# Altium PCB AQCA-Control-Interface.PcbDoc
Units mm, origin at the board's own origin, x right, y up, seen from the top; angles counter-clockwise.
Board outline 120 x 70 mm, 2 copper layers (Top Layer, Bottom Layer); 125 components, 84 nets, 423 pads, 100 vias.
Unrouted connection lines stored in the file: 4.
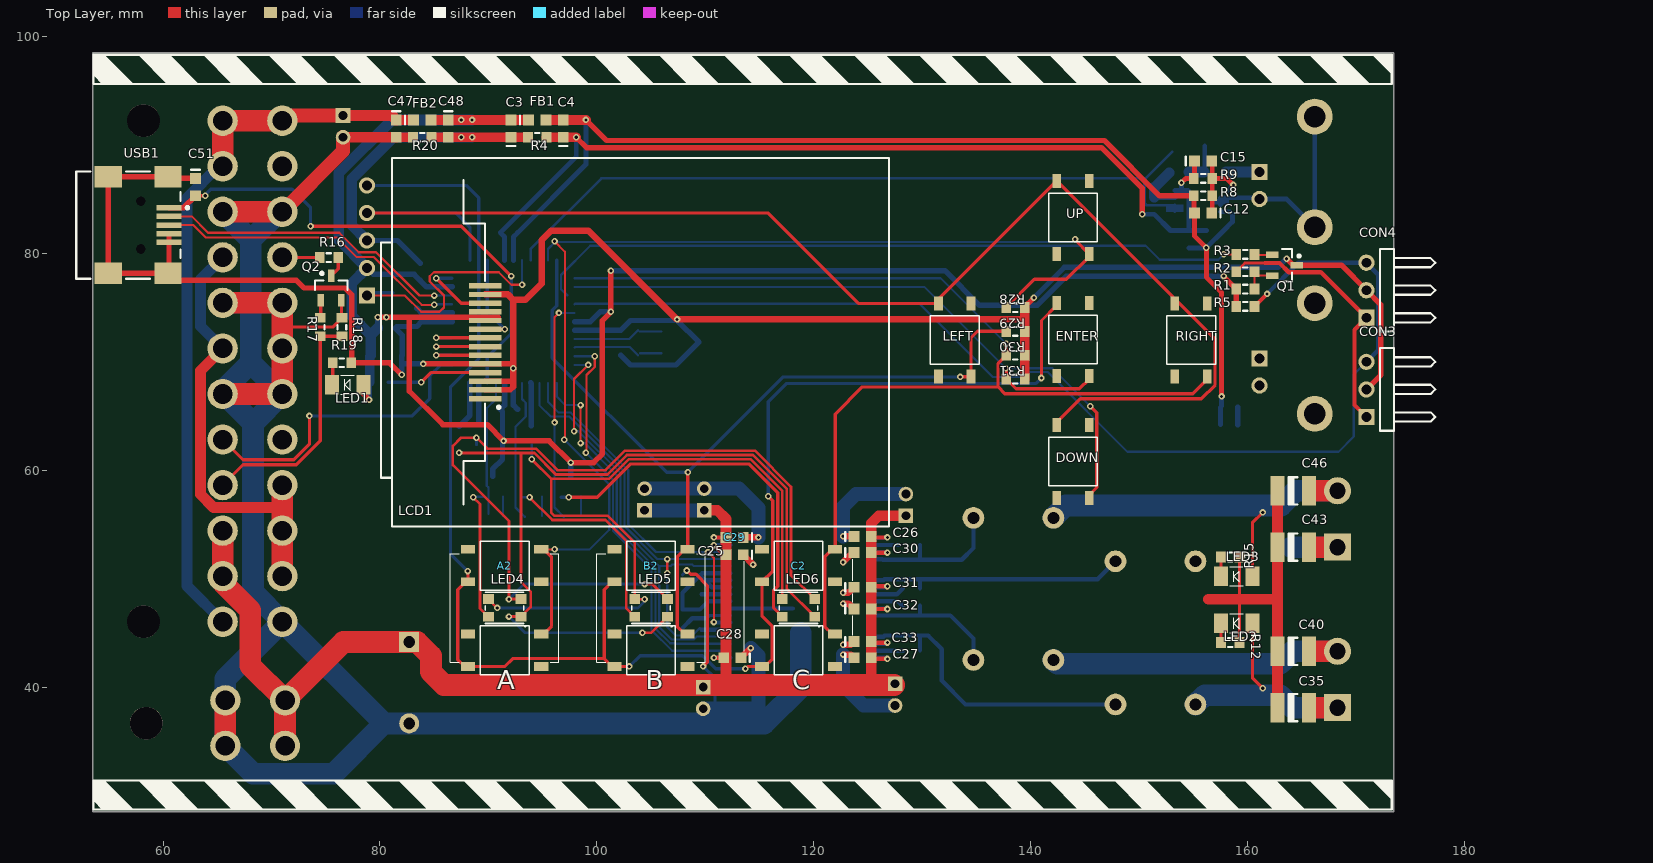
[diagram p0: Top Layer view]
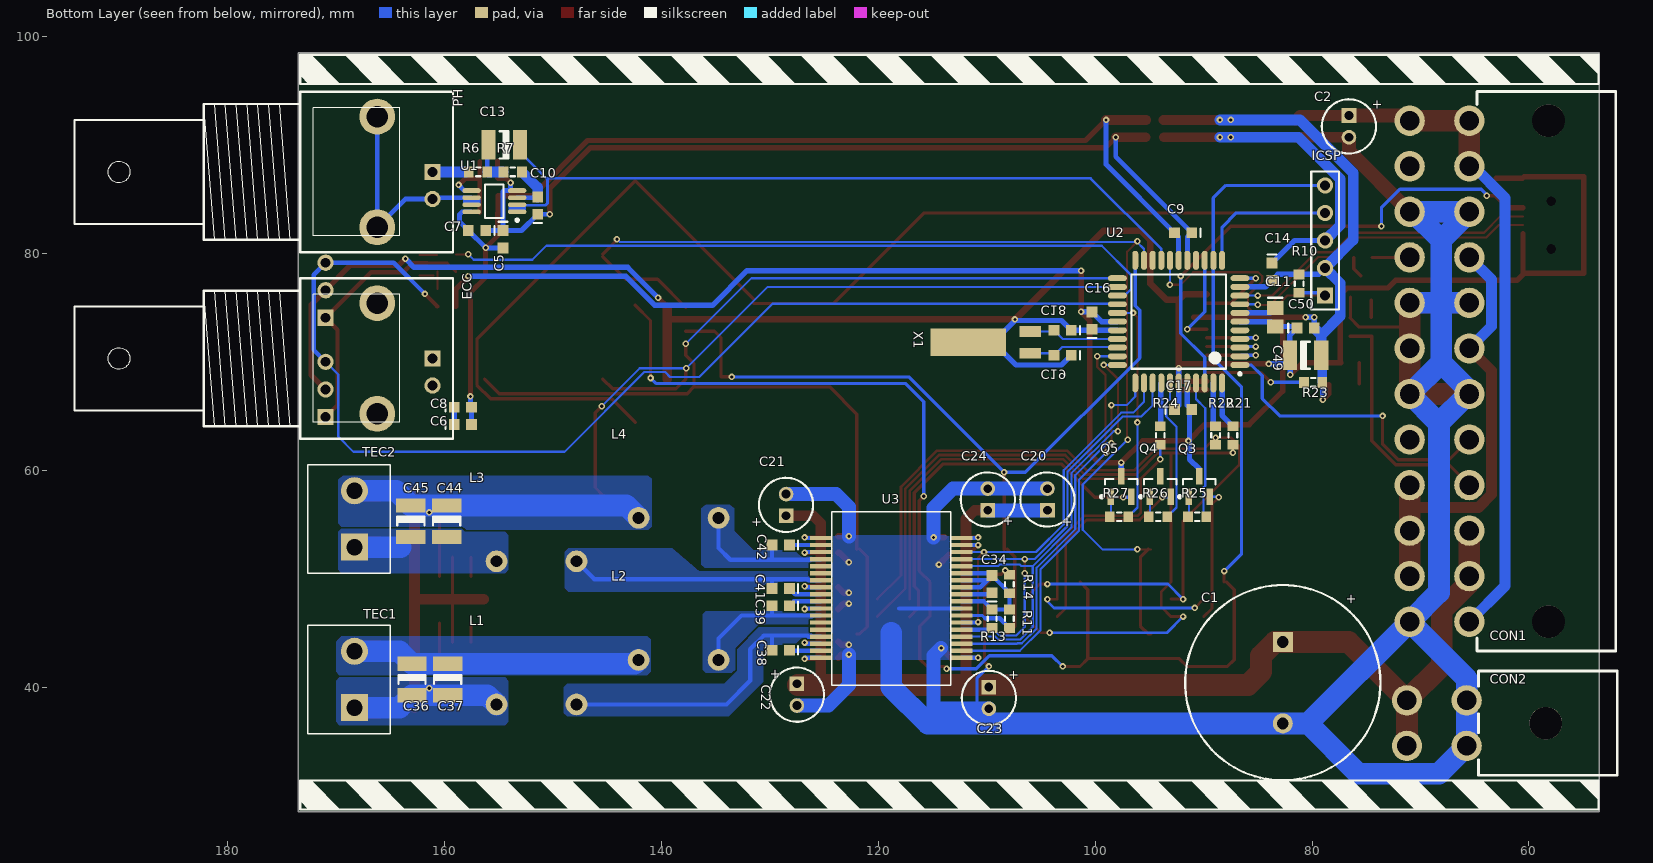
[diagram p1: Bottom Layer view, seen from below]

## Layer stack, top to bottom
Top Layer: signal copper 0.0356
Dielectric: dielectric 0.32, FR-4, Dk 4.8
Bottom Layer: signal copper 0.0356

## Board outline
53.5,98.5 53.5,28.5 173.5,28.5 173.5,98.5

## Design rules (kind name [scope] priority, off if disabled: settings)
Clearance [All] p1: gap=0.152
DiffPairsRouting [All] p1: maxlimit=0.254 minlimit=0.254 mostfreqgap=0.254 maxuncoupledlength=12.7
HoleSize [All] p1: absolutevalues=TRUE maxlimit=6.3 minlimit=0.3 maxpercent=80.000 minpercent=20.000
HoleToHoleClearance [All] p1: gap=0.1 allowstackedmicrovias=TRUE
MinimumSolderMaskSliver [All] p1: minsoldermaskwidth=0.1
PlaneClearance [All] p1: clearance=0.5
PlaneConnect [All] p1: planeconnectstyle=Direct reliefexpansion=0.508 reliefentries=4 reliefconductorwidth=0.254 reliefairgap=0.254
PolygonConnect [All] p1: connectstyle=Direct reliefconductorwidth=0.254 reliefentries=4 polygonreliefangle="90 Angle"
RoutingVias [All] p1: holewidth=0.3 width=0.6 viastyle="Through Hole" minholewidth=0.3 minwidth=0.6 maxholewidth=6.3 maxwidth=7
SilkToSilkClearance [All] p1: silktosilkclearance=0.1
SilkscreenOverComponentPads [All] p1: minsilkscreentomaskgap=0.1
SolderMaskExpansion [All] p1: expansion=0.05
Width [All] p1: maxlimit=12.7 minlimit=0.152 preferedwidth=0.152
20 further rules are at their usual default settings.

## Classes and differential pairs
component class AQCA-Control-IO-B0: A A2 B B2 C C2 C49 C50 C51 CON3 CON4 DOWN ENTER ICSP LCD1 LED4 LED5 LED6 LEFT Q1 Q3 Q4 Q5 R1 R2 R3 R5 R21 R22 R23 R24 R25 R26 R27 R28 R29 R30 R31 RIGHT UP USB1
component class AQCA-Control-uC-B0: C3 C4 C5 C6 C7 C8 C9 C10 C11 C12 C13 C14 C15 C16 C17 C18 C19 ECC FB1 PH R4 R6 R7 R8 R9 R10 U1 U2 X1
component class AQCA-Control-Power-B0: C2 C20 C21 C22 C23 C24 C25 C26 C27 C28 C29 C30 C31 C32 C33 C34 C35 C36 C37 C38 C39 C40 C41 C42 C43 C44 C45 C46 C47 C48 CON1 CON2 FB2 L1 L2 L3 L4 LED1 LED2 LED3 Q2 R11 R12 R13 R14 R15 R16 R17 R18 R19 R20 TEC1 TEC2 U3
differential pair USB_D: +USB_D_P -USB_D_N

## Components (designator, comment, footprint, x,y, rotation, side; value= is the part's Value field where it differs from the comment)
A "Tact Button NO" "TACT SMD 4.5×4.5mm" 95,41.9 r180 top
A2 "Tact Button NO" "TACT SMD 4.5×4.5mm" 95,49.7 r180 top
B "Tact Button NO" "TACT SMD 4.5×4.5mm" 108.5,41.9 r180 top
B2 "Tact Button NO" "TACT SMD 4.5×4.5mm" 108.5,49.7 r180 top
C "Tact Button NO" "TACT SMD 4.5×4.5mm" 122.1,41.9 r180 top
C1 "1200µF" CAPPR7.5-18x35.5 82.7,40.4 r270 bottom
C2 "Tact Button NO" "TACT SMD 4.5×4.5mm" 122.1,49.7 r180 top
C2 "33µF" CAPPR2-5x11 76.6,91.7 r270 bottom
C3 "100nF" CAPC1608N 92.1,91.5 r90 top
C4 "100nF" CAPC1608N 96.9,91.5 r90 top
C5 "100nF" CAPC1608N 154.6,81.3 r270 bottom
C6 "100nF" CAPC1608N 158.3,64.2 r180 bottom
C7 "1µF" CAPC1608N 157,82.1 r0 bottom
C8 "1µF" CAPC1608N 158.3,65.8 r180 bottom
C9 "100nF" CAPC1608N 91.9,81.9 r0 bottom
C10 "1µF" CAPC1608N 151.4,84.4 r90 bottom
C11 "10µF" CAPC2012N 83.4,74.1 r270 bottom
C12 "100nF" CAPC1608N 155.9,83.7 r180 top
C13 "10µF" CAPC3225N 154.5,90 r0 bottom
C14 "100nF" CAPC1608N 83.7,78.3 r270 bottom
C15 "100nF" CAPC1608N 155.9,88.5 r0 top
C16 "100nF" CAPC1608N 100.3,73.8 r90 bottom
C17 "100nF" CAPC1608N 91.9,65.6 r180 bottom
C18 "16pF" CAPC1608N 103,72.9 r0 bottom
C19 "16pF" CAPC1608N 103,70.6 r0 bottom
C20 "33µF" CAPPR2-5x11 104.4,57.3 r90 bottom
C21 "33µF" CAPPR2-5x11 128.5,56.8 r90 bottom
C22 "33µF" CAPPR2-5x11 127.5,39.3 r270 bottom
C23 "33µF" CAPPR2-5x11 109.8,39 r270 bottom
C24 "33µF" CAPPR2-5x11 109.9,57.3 r90 bottom
C25 "100nF" CAPC1608N 112.7,52.2 r180 top
C26 "100nF" CAPC1608N 124.5,53.9 r0 top
C27 "100nF" CAPC1608N 124.5,42.7 r0 top
C28 "100nF" CAPC1608N 112.5,42.7 r180 top
C29 "100nF" CAPC1608N 112.7,53.8 r180 top
C30 "100nF" CAPC1608N 124.5,52.4 r0 top
C31 "100nF" CAPC1608N 124.5,49.2 r0 top
C32 "100nF" CAPC1608N 124.5,47.2 r0 top
C33 "100nF" CAPC1608N 124.5,44.2 r0 top
C34 "100nF" CAPC1608N 109.5,49.5 r90 bottom
C35 "10µF" CAPC3225N 164.2,38.1 r0 top
C36 "10µF" CAPC3225N 163,40.7 r270 bottom
C37 "10µF" CAPC3225N 159.7,40.7 r270 bottom
C38 "100nF" CAPC1608N 129,43.4 r0 bottom
C39 "100nF" CAPC1608N 129,47.5 r0 bottom
C40 "10µF" CAPC3225N 164.2,43.3 r0 top
C41 "100nF" CAPC1608N 129,49.1 r0 bottom
C42 "100nF" CAPC1608N 129,53.1 r0 bottom
C43 "10µF" CAPC3225N 164.2,52.9 r0 top
C44 "10µF" CAPC3225N 159.8,55.3 r270 bottom
C45 "10µF" CAPC3225N 163.1,55.3 r270 bottom
C46 "10µF" CAPC3225N 164.2,58.1 r0 top
C47 "100nF" CAPC1608N 81.5,91.5 r270 top
C48 "100nF" CAPC1608N 86.3,91.5 r270 top
C49 "10µF" CAPC3225N 80.6,70.6 r180 bottom
C50 "100nF" CAPC1608N 80.6,73.1 r180 bottom
C51 "100nF" CAPC1608N 63,86.1 r270 top
CON1 "Molex Mini-Fit 24pin" "Molex Mini-Fit 24pin 90deg" 63.8,69.1 r90 bottom
CON2 "Molex Mini-Fit 4pin" "Molex Mini-Fit 4pin 90deg" 63,36.7 r90 bottom
CON3 "Header 3H" HDR1X3H 170.959,64.908 r90 top
CON4 "Header 3H" HDR1X3H 170.959,74.052 r90 top
DOWN "Tact Button NO" "TACT SMD 4.5×4.5mm" 142.4,57.3 r90 top
ECC "BNC" "BNC_RA CON" 161.1,70.3 r180 bottom
ENTER "Tact Button NO" "TACT SMD 4.5×4.5mm" 142.4,68.55 r90 top
FB1 "120" INDC1608N 94.5,92.3 r0 top
FB2 "120" INDC1608N 83.9,92.3 r0 top
ICSP "Header 5" HDR1X5 78.8,76.1 r90 bottom
L1 "3.9µH" "Inductor AIUR5-6" 151.5,38.4 r0 bottom
L2 "3.9µH" "Inductor AIUR5-6" 138.4,42.5 r0 bottom
L3 "3.9µH" "Inductor AIUR5-6" 151.5,51.6 r0 bottom
L4 "3.9µH" "Inductor AIUR5-6" 138.4,55.6 r0 bottom
LCD1 "LCD JD-T1800" "LCD JD-T1800" 89.7,71.8 r270 top
LED1 "Green" "LED 3216m" 77.022,67.872 r180 top
LED2 "Red" "LED 3216m" 159,45.9 r180 top
LED3 "Blue" "LED 3216m" 159,50.2 r180 top
LED4 "LED RGB common A" "LED 3528m" 91.5,47.3 r270 top
LED5 "LED RGB common A" "LED 3528m" 105,47.3 r270 top
LED6 "LED RGB common A" "LED 3528m" 118.6,47.3 r270 top
LEFT "Tact Button NO" "TACT SMD 4.5×4.5mm" 131.5,68.5 r90 top
PH "BNC" "BNC_RA CON" 161.1,87.5 r180 bottom
Q1 "*" SOT23_N 163.4,78.9 r0 top
Q2 "S8050" SOT23_N 75.5,76.8 r90 top
Q3 "MOSFET P-Ch" SOT23-3N 90.4,58.5 r90 bottom
Q4 "MOSFET P-Ch" SOT23-3N 94,58.5 r90 bottom
Q5 "MOSFET P-Ch" SOT23-3N 97.6,58.5 r90 bottom
R1 "10K" RESC1608N 159.8,76.7 r180 top
R2 "1K" RESC1608N 159.8,78.3 r180 top
R3 "10K" RESC1608N 159.8,79.9 r0 top
R4 "0" RESC1608N 94.5,90.7 r0 top
R5 "10K" RESC1608N 159.8,75.1 r180 top
R6 "10K" RESC1608N 156.9,87.5 r180 bottom
R7 "10K" RESC1608N 153.7,87.5 r180 bottom
R8 "12.4K" RESC1608N 155.9,85.3 r180 top
R9 "12.4K" RESC1608N 155.9,86.9 r0 top
R10 "10K" RESC1608N 81.2,77.2 r270 bottom
R11 "27K" RESC1608N 107.9,46.3 r270 bottom
R12 "1K" RESC1608N 158.4,44.1 r0 top
R13 "10K" RESC1608N 109.5,46.3 r270 bottom
R14 "0" RESC1608N 107.9,49.5 r270 bottom
R15 "1K" RESC1608N 158.4,52 r0 top
R16 "10K" RESC1608N 75.3,79.6 r0 top
R17 "10K" RESC1608N 74.5,73.2 r270 top
R18 "10K" RESC1608N 76.5,73.2 r270 top
R19 "470" RESC1608N 76.5,69.9 r180 top
R20 "0" RESC1608N 83.9,90.7 r0 top
R21 "470" RESC1608N 87.3,63.2 r270 bottom
R22 "330" RESC1608N 88.9,63.2 r270 bottom
R23 "0" RESC1608N 79.9,68.1 r0 bottom
R24 "330" RESC1608N 94,63.2 r270 bottom
R25 "1K" RESC1608N 90.6,55.7 r180 bottom
R26 "1K" RESC1608N 94.2,55.7 r180 bottom
R27 "1K" RESC1608N 97.8,55.7 r0 bottom
R28 "10K" RESC1608N 138.6,75 r180 top
R29 "10K" RESC1608N 138.6,72.8 r180 top
R30 "10K" RESC1608N 138.6,70.6 r180 top
R31 "10K" RESC1608N 138.6,68.4 r180 top
RIGHT "Tact Button NO" "TACT SMD 4.5×4.5mm" 153.3,68.5 r90 top
TEC1 "High-Power Connector 2p" "High-Power Connector 2" 168.3,38.1 r90 bottom
TEC2 "High-Power Connector 2p" "High-Power Connector 2" 168.3,52.9 r90 bottom
U1 "MAX4477" UMAX8_N 155.4,84.8 r0 bottom
U2 "PIC32MX250FxxxD" TQFP44_N 92.3,73.7 r0 bottom
U3 "DRV8432" PSOP3-36 112.3,42.7 r90 bottom
UP "Tact Button NO" "TACT SMD 4.5×4.5mm" 142.4,79.8 r90 top
USB1 "USB-Conn Mini-B SMD" 440478 52.7,82.6 r180 top
X1 "Crystal" "Quartz Can 2.1mm Hor" 111.7,71.8 r180 bottom

## Footprints (in the part's own frame and the unit in brackets; to place one, negate y for a bottom-side part, rotate by r counter-clockwise, add the part's x,y. Pads: shape width x height; smd on the part's side, far side on the other; paste and mask are expansions set on the pad)
440478 [mm] "Connector; USB2.0, Type A, SM; 5 Position; Right Angle"
  rect 2.3x0.5 smd: 1(-7.85,-1.6) 2(-7.85,-0.8) 3(-7.85,0) 4(-7.85,0.8) 5(-7.85,1.6)
  rect 2.5x2 smd: 6(-7.75,4.45) 7(-2.25,4.45) 8(-7.75,-4.45) 9(-2.25,-4.45)
  round 0.6 hole 0.9 unplated: MH1(-5.25,2.2) MH2(-5.25,-2.2)
  silkscreen extent -9.68,-4.95 0.7,4.95
"BNC_RA CON" [mm] "Connector; BNC Elbow"
  rect 1.5x1.5 hole 0.9: 1(0,0)
  round 3.3 hole 2: 2(-5.1,-5.1) 2(-5.1,5.1)
  round 1.5 hole 0.9: 2(0,-2.5)
  silkscreen extent -33,-7.4 1.9,7.4
CAPC1608N [mm] "Chip Capacitor, Body 1.6x0.8mm, IPC Medium Density"
  rect 1x1 smd: 1(-0.8,0) 2(0.8,0)
  silkscreen extent -1.6,-0.4 -1.6,0.4, body extent -0.87,-0.48 0.87,0.48, height 0.85
CAPC2012N [mm] "Chip Capacitor, Body 2.0x1.3mm, IPC Medium Density"
  rect 1.3x1.5 smd: 1(-0.85,0) 2(0.85,0)
  silkscreen extent -1.8,-0.65 -1.8,0.65, body extent -1.1,-0.72 1.1,0.72, height 1.1
CAPC3225N [mm] "Chip Capacitor, Body 3.2x2.5mm, IPC Medium Density"
  rect 1.3x2.7 smd: 1(-1.45,0) 2(1.45,0)
  silkscreen extent -0.4,-1.25 0.4,1.25, body extent -1.7,-1.35 1.7,1.35, height 1.35
CAPPR2-5x11 [mm] "Capacitor, Electrolytic, Radial; Body 5 x 11 mm (Dia.xH typ); Pin Spacing 2 mm (typ)"
  rect 1.35x1.35 hole 0.8: 1(-1,0)
  round 1.35 hole 0.8: 2(1,0)
  silkscreen extent -2.5,-2.5 2.5,2.5
CAPPR7.5-18x35.5 [mm] "Capacitor, Electrolytic, Radial; Body 18 x 35.5 mm (Dia.xH typ); Pin Spacing 7.5 mm (typ)"
  rect 1.85x1.85 hole 1.1: 1(-3.75,0)
  round 1.85 hole 1.1: 2(3.75,0)
  silkscreen extent -9,-9 9,9
HDR1X3H [mm] "Connector; Header; 3 Position; Right Angle"
  rect 1.5x1.5 hole 0.9: 1(0,0)
  round 1.5 hole 0.9: 2(2.54,0) 3(5.08,0)
  silkscreen extent -1.27,-6.35 6.35,-1.27
HDR1X5 [mm] "Connector; Header; 5 Position"
  rect 1.5x1.5 hole 0.9: 1(0,0)
  round 1.5 hole 0.9: 2(2.54,0) 3(5.08,0) 4(7.62,0) 5(10.16,0)
  silkscreen extent -1.27,-1.27 11.43,1.27
"High-Power Connector 2" [mm] "High-Power connector 2pin with screw"
  rect 2.5x2.5 hole 1.5: 1(0,0)
  round 2.5 hole 1.5: 2(5.2,0)
  silkscreen extent -2.4,-3.3 7.6,4.3, body extent -2.4,-3.3 7.6,4.3, height 9.9
INDC1608N [mm] "Chip Inductor, Body 1.6x0.8mm, IPC Medium Density"
  rect 1x1 smd: 1(-0.8,0) 2(0.8,0)
  silkscreen extent -1.6,-0.4 -1.6,0.4, body extent -0.87,-0.48 0.87,0.48, height 0.71
"Inductor AIUR5-6" [mm] "Abracon AIUR5-6 Inductor family 12.7mm dia"
  round 2 hole 1.1: 1(-3.675,0) 2(3.7,0)
  body extent -6.3,-6.34 6.35,6.34, height 18
"LCD JD-T1800" [mm] "LCD SMD 34×46mm body"
  rect 0.5x3 smd: 1(5.2,0) 2(4.4,0) 3(3.6,0) 4(2.8,0) 5(2,0) 6(1.2,0) 7(0.4,0) 8(-0.4,0) 9(-1.2,0) 10(-2,0) 11(-2.8,0) 12(-3.6,0) 13(-4.4,0) 14(-5.2,0)
  silkscreen extent -17,-9.6 17,37.23, body extent -17,-8.6 17,37.23, height 2.85
"LED 3216m" [mm] "LED 3.2×1.6mm"
  rect 1.3x1.8 smd: A(-1.45,0) K(1.45,0)
  silkscreen extent -0.63,-0.87 0.63,0.87, body extent -1.6,-0.8 1.6,0.8, height 1
"LED 3528m" [mm] "LED RGB 3528m common A"
  rect 0.9x1 smd: 1(0.812,1.5) 2(0.812,-1.5) 3(-0.813,-1.5) 4(-0.813,1.5)
  silkscreen extent -1.44,-1.77 1.74,1.93, body extent -1.44,-1.77 1.44,1.78, height 1.9
"Molex Mini-Fit 4pin 90deg" [mm] "Computer CPU Power Connector 90deg"
  round 2.8 hole 1.8: 1(2.075,2.75) 2(-2.125,2.75) 3(2.075,8.25) 4(-2.125,8.25)
  round 3 hole 3 unplated: 5(-0.025,-4.55)
  silkscreen extent -4.82,-11.15 4.77,1.65, body extent -4.82,-11.15 4.77,1.65, height 11
"Molex Mini-Fit 24pin 90deg" [mm] "Molex ATX Motherboard Connector 90deg"
  round 3 hole 3 unplated: 0(-23.075,-5.6) 0(23.125,-5.6)
  round 2.8 hole 1.8 unplated: 1(23.125,1.7) 2(18.925,1.7) 3(14.725,1.7) 4(10.525,1.7) 5(6.325,1.7) 6(2.125,1.7) 7(-2.075,1.7) 8(-6.275,1.7) 9(-10.475,1.7) 10(-14.675,1.7) 11(-18.875,1.7) 12(-23.075,1.7) 13(23.125,7.2) 14(18.925,7.2) 15(14.725,7.2) 16(10.525,7.2) 17(6.325,7.2) 18(2.125,7.2) 19(-2.075,7.2) 20(-6.275,7.2) 21(-10.475,7.2) 22(-14.675,7.2) 23(-18.875,7.2) 24(-23.075,7.2)
  silkscreen extent -25.78,-11.8 25.83,1, body extent -25.78,-11.8 25.83,1, height 11
PSOP3-36 [mm] "PSOP3 36pin 11×15.9mm body"
  rrect10% 0.4x2 smd: 1(0,0) 2(0.65,0) 3(1.3,0) 4(1.95,0) 5(2.6,0) 6(3.25,0) 7(3.9,0) 8(4.55,0) 9(5.2,0) 10(5.85,0) 11(6.5,0) 12(7.15,0) 13(7.8,0) 14(8.45,0) 15(9.1,0) 16(9.75,0) 17(10.4,0) 18(11.05,0) 19(11.05,13) 20(10.4,13) 21(9.75,13) 22(9.1,13) 23(8.45,13) 24(7.8,13) 25(7.15,13) 26(6.5,13) 27(5.85,13) 28(5.2,13) 29(4.55,13) 30(3.9,13) 31(3.25,13) 32(2.6,13) 33(1.95,13) 34(1.3,13) 35(0.65,13) 36(0,13)
  silkscreen extent -2.52,1 13.47,12, body extent -2.52,1 13.47,12, height 3.55
"Quartz Can 2.1mm Hor" [mm] "Quartz TH Can 2.1×6.2mm Horizontal"
  rect 2x1 smd: 1(5.725,0.975) 2(5.725,-1.025)
  rect 7x2.5 smd: 3(0,0)
RESC1608N [mm] "Chip Resistor, Body 1.6x0.8mm, IPC Medium Density"
  rect 0.9x1 smd: 1(-0.85,0) 2(0.85,0)
  silkscreen extent -0.2,-0.4 0.2,0.4, body extent -0.85,-0.48 0.85,0.48, height 0.6
SOT23-3N [mm] "SOT23, 3-Leads, Body 2.9x1.3mm, Pitch 0.95mm, Lead Span 2.5mm, IPC Medium Density"
  rect 1.5x0.6 smd: 1(-0.95,0.95) 2(-0.95,-0.95) 3(0.95,0)
  silkscreen extent -1.07,-1.5 0.7,1.93, body extent -0.7,-1.5 0.7,1.5, height 1.1
SOT23_N [mm] "SOT23, 3-Leads, Body 2.9x1.3mm, Pitch 0.95mm, Lead Span 2.3mm - Reverse Pinning, IPC Medium Density"
  rect 1.15x0.6 smd: 1(1.125,0) 2(-1.125,-0.95) 3(-1.125,0.95)
  silkscreen extent -0.2,-1.5 1.48,1.5, body extent -0.7,-1.5 0.7,1.5, height 1.1
"TACT SMD 4.5×4.5mm" [mm] "Tact push-button SMD 4.5×4.5mm body"
  rect 1.3x0.8 smd: 1(0.125,-3) 2(6.875,-3) 3(0.125,0) 4(6.875,0)
  silkscreen extent 1.25,-3.75 5.75,0.75, body extent 1.25,-3.75 5.75,0.75, height 3.8
TQFP44_N [mm] "Thin QFP, 44-Leads, Body 10x10mm, Pitch 0.8mm, IPC Medium Density"
  oval 1.75x0.55 smd: 1(-5.65,4) 2(-5.65,3.2) 3(-5.65,2.4) 4(-5.65,1.6) 5(-5.65,0.8) 6(-5.65,0) 7(-5.65,-0.8) 8(-5.65,-1.6) 9(-5.65,-2.4) 10(-5.65,-3.2) 11(-5.65,-4) 23(5.65,-4) 24(5.65,-3.2) 25(5.65,-2.4) 26(5.65,-1.6) 27(5.65,-0.8) 28(5.65,0) 29(5.65,0.8) 30(5.65,1.6) 31(5.65,2.4) 32(5.65,3.2) 33(5.65,4)
  oval 0.55x1.75 smd: 12(-4,-5.65) 13(-3.2,-5.65) 14(-2.4,-5.65) 15(-1.6,-5.65) 16(-0.8,-5.65) 17(0,-5.65) 18(0.8,-5.65) 19(1.6,-5.65) 20(2.4,-5.65) 21(3.2,-5.65) 22(4,-5.65) 34(4,5.65) 35(3.2,5.65) 36(2.4,5.65) 37(1.6,5.65) 38(0.8,5.65) 39(0,5.65) 40(-0.8,5.65) 41(-1.6,5.65) 42(-2.4,5.65) 43(-3.2,5.65) 44(-4,5.65)
  silkscreen extent -5.77,-4.35 4.35,4.95, body extent -5,-5 5,5, height 1.2
UMAX8_N [mm] "TSOP, 8-Leads, Body 3x3mm, Pitch 0.65mm, IPC Medium Density"
  oval 1.7x0.45 smd: 1(-2.1,0.975) 2(-2.1,0.325) 3(-2.1,-0.325) 4(-2.1,-0.975) 5(2.1,-0.975) 6(2.1,-0.325) 7(2.1,0.325) 8(2.1,0.975)
  silkscreen extent -2.22,-1.55 0.85,1.87, body extent -1.6,-1.6 1.6,1.6, height 1.1

## Part data
C1 C2 C20 C21 C22 C23 C24: library part "Capacitor Polarised"
C3 C4 C5 C6 C7 C8 C9 C10 C11 C12 C13 C14 C15 C16 C17 C18 C19 C25 C26 C27 C28 C29 C30 C31 C32 C33 C34 C35 C36 C37 C38 C39 C40 C41 C42 C43 C44 C45 C46 C47 C48 C49 C50 C51: library part Capacitor
CON3 CON4: "Header, 3-Pin, Right Angle"
ECC PH: "BNC Elbow Connector"
FB1 FB2 L1 L2 L3 L4: library part Inductor
ICSP: "Header, 5-Pin"
LED1 LED2 LED3: library part LED
Q1: library part PNP
Q2: library part NPN
R1 R2 R3 R4 R5 R6 R7 R8 R9 R10 R11 R12 R13 R14 R15 R16 R17 R18 R19 R20 R21 R22 R23 R24 R25 R26 R27 R28 R29 R30 R31: library part Resistor
U1: library part "Opamp dual"

## Via types
v1: diameter 0.6, hole 0.3, Top Layer to Bottom Layer, tented both sides, 68 vias
v2: diameter 0.6, hole 0.3, Top Layer to Bottom Layer, 32 vias

## Nets (pads, with @x,y where several pads share a name; then routed paths per layer and width w, separated by ;. In a path a pad name is that pad's centre, name@x,y a point inside that pad or via, vN(x,y) a via of type N, cw(c..) or ccw(c..) an arc to the next point about the centre after c; other vN are vias at no path point)
AGND: C34.2 R11.1 R13.1 R14.2 U3.9 U3.11 U3.12 U3.13 | length 16.7
  Bottom Layer w0.4: C34.2@109.7,50.5 U3.13 ; U3.9 110.25,47.9 R13.1 R11.1 R14.2 107.9,48.7 C34.2 C34.2@109.95,49.85 ; U3.11 110.6,49.2 C34.2@109.95,49.85 ; U3.12 C34.2@109.95,49.85
AVDD: C4.2 C5.2 C6.2 C7.2 C8.2 C9.2 C12.2 FB1.2 R8.2 U1.8 U2.17 | length 107.1
  Top Layer w0.45: C12.2@155.05,83.75 R8.2 ; C12.2 155.1,81.6 v1(156.2,80.5) 156.2,77.8 157.6,76.4 v2(157.6,66.8)
  Top Layer w0.5: v2(99,92.3) 100.9,90.4 146.8,90.4 151.9,85.3 R8.2
  Top Layer w0.9: FB1.2 C4.2 v2(99,92.3)
  Bottom Layer w0.45: U2.17 92.3,81.5 C9.2 99,88.2 v2@99,92.2 ; C5.2 v1(156.2,80.5) C7.2 158.6,82.9 158.6,83.6 158.375,83.825 U1.8 ; C6.2 C8.2 ; C8.2@157.6,65.9 v2(157.6,66.8)
AVSS: C4.1 C5.1 C6.1 C7.1 C8.1 C9.1 C10.1 C15.1 R4.2 R9.1 U1.4 U2.16 | length 90.1
  Top Layer w0.45: v1(153.9,86.5) 154.3,86.9 R9.1 ; R9.1@155.1,86.95 C15.1
  Top Layer w0.5: v2(98.1,90.7) 99.052,89.748 146.53,89.748 150.3,85.977 v2(150.3,83.6) v2@150.277,83.6
  Top Layer w0.9: R4.2 C4.1 v2(98.1,90.7)
  Bottom Layer w0.45: U2.16 91.5,81.5 C9.1 98.1,88.9 v2(98.1,90.7) ; v2(150.3,83.6) C10.1 152.9,82.1 C5.1 ; U1.4 154.525,85.775 154.6,85.7 C5.1 ; 153.9,86 v1(153.9,86.5) ; C7.1 C5.1
  Bottom Layer w0.5: C6.1 C8.1
GND: C1.2 C2.2@76.6,90.7 C20.2 C21.2 C22.2 C23.2 C24.2 C25.1 C26.1 C27.1 C28.1 C29.1 C30.1 C31.1 C32.1 C33.1 C35.1 C40.1 C43.1 C46.1 C47.2 CON1.3 CON1.5 CON1.7 CON1.15 CON1.17 CON1.18 CON1.19 CON1.24 CON2.1 CON2.2 Q2.2 R12.2 R14.1 R15.2 R18.1 R20.1 U3.8 U3.23 U3.24 U3.31 U3.32 | length 314.4
  Top Layer w0.3: 71.1,73.2 75.65,73.2 R18.1 ; R18.1@76.45,74.05 Q2.2 Q2.2@76.45,75.95 ; v2(108.3,50.75) 108.648,50.402 109.15,50.402 110.197,49.355 110.197,45.75 110.197,42.297 v2(109.8,41.9) ; R12.2 159.25,48.1 R15.2
  Top Layer w0.6: C28.1 v1(114.2,43.6) ; C25.1 v1(114.4,51.3) ; C29.1@113.9,53.8 v1(114.9,53.8) ; v1(122.7,43) 123.4,43 C27.1 ; v1(122.7,43.9) 123.4,43.9 C33.1 ; v1(122.7,47.7) 123.2,47.7 C32.1 ; v1(122.7,48.7) 123.2,48.7 C31.1 ; v1(122.7,51.5) 123.6,52.4 C30.1 ; v1(122.7,53.9) C26.1
  Top Layer w0.9: C47.2 R20.1
  Top Layer w1: C2.2@76.6,90.7 C47.2 ; 156.4,48.1 159.25,48.1 162.75,48.1 ; C35.1 C40.1 162.75,48.1 ; C46.1 C43.1 162.75,48.1
  Top Layer w1.3: CON1.15 76.6,89.425 C2.2@76.6,90.7
  Top Layer w2: CON1.7 CON1.19 CON1.18 CON1.17 CON1.5 ; CON1.3 CON1.15 ; CON2.2 CON2.1
  Bottom Layer w0.3: R14.1 v2(108.3,50.75) ; v2(109.8,41.9) 110.9,40.8 110.9,38
  Bottom Layer w0.4: U3.8 118.05,47.25
  Bottom Layer w1.3: C20.2 C24.2 113.1,58.3 114.9,56.5 v1(114.9,53.8) ; C23.2 110.9,38 114.8,38 114.9,38.1 114.9,42.9 v1(114.2,43.6) ; v1(122.7,43) 122.7,40.2 124.6,38.3 C22.2 ; v1(122.7,53.9) 122.7,56.6 123.9,57.8 C21.2
  Bottom Layer w2: CON1.5 68.1,75.425 ; CON1.17 68.1,75.425 ; CON1.15 CON1.15@70.7,83.825 ; 118.8,45 118.8,40 115.45,36.65 C1.2 80.375,36.65 ; 68.1,69.925 68.1,75.425 ; 68.1,69.925 65.5,67.325 CON1.7 65.6,67.025 68.3,64.325 ; 68.1,69.925 CON1.19 68.3,64.325 ; 68.1,75.425 68.1,81.225 ; 68.1,81.225 CON1.15@70.7,83.825 ; 68.1,81.225 CON1.3 CON1.15@70.7,83.825 ; 68.3,64.325 68.3,48.725 CON1.24 ; CON1.24 65.75,40.775 CON2.1 CON2.2 68.302,32.023 75.748,32.023 80.375,36.65 ; CON1.24 80.375,36.65
NetA2_1: A2.1 A.1 R28.2 U2.21 UP.1 | length 105.9
  Top Layer w0.2: A2.1 95.1,52.7 v2(96.1,52.7) ; v2(96.1,81.1) 97.052,80.148 97.052,62.852 v2(97,62.8)
  Top Layer w0.3: A.1 95.1,44.9 95.827,45.627 95.827,51.973 A2.1@95.1,52.7 ; R28.2 140.35,77.6 143.3,77.6 UP.1@145.4,79.7 ; v2(144.1,81.3) 144.1,81.225 UP.1
  Bottom Layer w0.2: U2.21 95.5,80.4 96.152,81.052 143.852,81.052 v2(144.1,81.3) ; v2(96.1,52.7) 99.338,52.7 101.138,54.5 101.138,58.681 97.019,62.8 v2(97,62.8)
NetA2_2: A2.4 A.4 B2.4 B.4 C2.4 C.4 ENTER.4 ICSP.5 U2.13 | length 152
  Top Layer w0.3: A2.4@87.9,49.7 87.173,48.973 87.173,42.527 87.8,41.9 A.4 91.5,41.9 92.227,42.627 100.673,42.627 ; v1(88.1,50.7) 88.125,50.675 A2.4 ; B2.4@101.4,49.7 100.673,48.973 100.673,42.627 ; v1(103,41.9) B.4 101.4,41.9 100.673,42.627 ; v1(113.7,41.7) 113.897,41.898 115.223,41.898 C.4 115.5,41.9 116.177,42.577 116.177,45.623 115.225,46.575 C2.4 116.22,50.695 116.22,57.18 v2(115.8,57.6) ; v2(141,68.5) 141,73.8 ENTER.4@142.4,75.2
  Bottom Layer w0.3: ICSP.5 87.94,86.26 89.1,85.1 U2.13 89.1,70.267 86.498,67.664 86.498,52.302 v1(88.1,50.7) ; v1(103,41.9) 104,42.9 109.748,42.9 110.948,41.7 v1(113.7,41.7) ; v2(115.8,57.6) 115.8,66.3 117.498,67.998 140.498,67.998 v2(141,68.5)
NetB2_1: B2.1 B.1 LEFT.1 R29.2 U2.22 | length 78.6
  Top Layer w0.3: B2.1@108.1,52.7 107.423,52.023 107.423,45.577 108.1,44.9 B.1 ; B2.1 108.375,59.775 v1(108.4,59.8) ; v1(133.5,68.6) 133.525,68.625 LEFT.1 134.5,72.2 135.1,72.8 R29.2
  Bottom Layer w0.3: U2.22 96.3,75.152 95.898,74.75 95.898,70.336 106.433,59.8 v1(108.4,59.8) 117.2,68.6 v1(133.5,68.6)
NetC2_1: C2.1@121.975,52.7 C.1 R30.2 RIGHT.1 U2.23 | length 103.9
  Top Layer w0.3: C2.1@121.7,52.7 121.023,52.023 121.023,45.577 121.7,44.9 C.1 ; C2.1@121.975,52.7 121.975,65.175 124.473,67.673 136.998,67.673 ; v1(137.75,71.65) R30.2 136.998,69.848 136.998,67.673 ; RIGHT.1@156.3,68.4 154.948,67.048 137.623,67.048 136.998,67.673
  Bottom Layer w0.2: U2.23 131.7,77.7 v1(137.75,71.65)
NetC10_2: C10.2 R7.2 U1.3 | length 4.7
  Bottom Layer w0.25: C10.2 C10.2@151.475,85.125
  Bottom Layer w0.45: C10.2@151.475,85.125 U1.3
  Bottom Layer w1: C10.2 151.4,86.05 R7.2@152.775,87.425
NetC11_1: C11.1 U2.7 | length 3.4
  Bottom Layer w0.5: C11.1 83.85,74.5 U2.7
NetC12_1: C12.1 C15.2 R8.1 R9.2 U1.5 | length 7.6
  Top Layer w0.45: C12.1@156.75,83.75 R8.1 R9.2 ; C15.2@156.75,88.45 R9.2 ; v1(158.7,86.3) 158.1,86.9 R9.2
  Bottom Layer w0.45: U1.5@158.175,85.775 v1(158.7,86.3)
NetC13_1: C13.1 U1.1 U1.2 U2.19 | length 69.8
  Bottom Layer w0.25: U2.19 93.9,80.4 100.411,86.911 150.589,86.911 ; C13.1@153.05,89.35 150.5,86.8 150.5,84.6 150.589,84.511 150.677,84.423 153.248,84.423 U1.2 U1.1
NetC13_2: C13.2 R6.2 R7.1 | length 3.8
  Bottom Layer w0.45: R6.2 C13.2@156.05,89.9
  Bottom Layer w1: R7.1@154.6,87.5 R6.2@156,87.5
NetC18_2: C18.2 U2.30 X1.1 | length 8.2
  Bottom Layer w0.2: U2.30 103,72.1 C18.2 ; C18.2@103.925,72.775 X1.1
NetC19_2: C19.2 U2.31 X1.2 | length 8.2
  Bottom Layer w0.2: U2.31 98.002,71.352 103.048,71.352 C19.2 ; C19.2@103.975,70.775 X1.2
NetC34_1: C34.1 U3.10 | length 2.6
  Bottom Layer w0.4: C34.1@109.65,48.55 U3.10
NetC35_2: C35.2 C36.2 C37.2 L1.2 LED2.A TEC1.1 | length 22.5
  Top Layer w0.3: LED2.A 160.45,40.85 v2(161.4,39.9)
  Top Layer w2: C35.2@166.1,38.1 TEC1.1
  Bottom Layer w2: L1.2 156.05,39.25 C37.2 C36.2 164.15,38.1 TEC1.1
NetC36_1: C36.1 C37.1 C40.2 L2.2 TEC1.2 | length 29
  Top Layer w2: C40.2@166.1,43.3 TEC1.2
  Bottom Layer w2: L2.2 142.45,42.15 C37.1 C36.1 164.15,43.3 TEC1.2
NetC38_1: C38.1 U3.35 | length 3
  Bottom Layer w0.4: U3.35 C38.1@128.25,43.35
NetC38_2: C38.2 L1.1 U3.33 | length 28.3
  Bottom Layer w0.3: U3.33 U3.33@125.352,44.702
  Bottom Layer w0.4: U3.33 126.427,44.65 126.53,44.752 130.548,44.752 131.8,43.5 131.8,40.6 134,38.4 L1.1 ; C38.2 129.8,44.752
NetC39_1: C39.1 U3.28 | length 3.1
  Bottom Layer w0.4: U3.28 127.8,47.9 C39.1
NetC39_2: C39.2 L2.1 U3.30 | length 13.2
  Bottom Layer w0.3: U3.30 U3.30@125.302,46.598
  Bottom Layer w0.4: U3.30@125.302,46.598 132.602,46.598 134.725,44.475 L2.1 ; 129.8,46.598 C39.2
NetC41_1: C41.1 U3.27 | length 3.1
  Bottom Layer w0.4: U3.27 127.65,48.55 C41.1
NetC41_2: C41.2 L3.1 U3.25 | length 24.2
  Bottom Layer w0.3: U3.25 U3.25@125.352,49.902
  Bottom Layer w0.4: U3.25 126.427,49.85 126.53,49.952 146.177,49.952 L3.1 ; C41.2 129.8,49.952
NetC42_1: C42.1 U3.20 | length 2.6
  Bottom Layer w0.4: U3.20 C42.1@127.9,53.1
NetC42_2: C42.2 L4.1 U3.22 | length 14
  Bottom Layer w0.4: U3.22 126.3,51.8 126.353,51.747 133.647,51.747 134.725,52.825 L4.1 ; 129.8,51.747 C42.2
NetC43_2: C43.2 C44.2 C45.2 L3.2 TEC2.1 | length 6.4
  Top Layer w2: C43.2@166.1,52.9 TEC2.1
  Bottom Layer w2: 164.05,52.9 TEC2.1
NetC44_1: C44.1 C45.1 C46.2 L4.2 LED3.A TEC2.2 | length 35.7
  Top Layer w0.3: LED3.A 160.45,55.15 v2(161.4,56.1)
  Top Layer w2: C46.2@166.1,58.1 TEC2.2
  Bottom Layer w2: L4.2 143.25,56.75 C44.1 C45.1 164.45,58.1 TEC2.2
NetCON1_8: CON1.8 U2.1 | length 28.3
  Top Layer w0.3: CON1.8 67.373,60.952 72.052,60.952 73.5,62.4 v2(73.5,65)
  Bottom Layer w0.3: v2(73.5,65) 83,65 84.6,66.6 84.6,68.7 85.6,69.7 U2.1
NetCON1_16: CON1.16 R16.1 | length 3.4
  Top Layer w0.3: CON1.16@71.025,79.6 R16.1
NetCON3_1: CON3.1 CON4.1 R2.2 | length 24.5
  Top Layer w0.25: R2.2 159.75,79.1 161.6,79.1
  Top Layer w0.4: 161.6,79.1 162.952,79.1 163.804,78.248 166.763,78.248 CON4.1 169.857,72.95 169.857,66.01 CON3.1
NetCON3_3: CON3.3 CON4.3 R5.1 U2.26 | length 107.9
  Top Layer w0.4: R5.1 v2(161.8,76.25)
  Bottom Layer w0.2: U2.26 98.002,75.352 129.748,75.352 136.5,68.6 139.2,68.6 139.652,69.052 141.566,69.052 148.919,61.7 168.4,61.7 169.8,63.1 169.8,68.829 CON3.3
  Bottom Layer w0.4: v2(161.8,76.25) 164.682,79.132 CON4.3 172.061,78.03 172.061,71.09 CON3.3
NetDOWN_1: DOWN.1 ENTER.1 R31.2 U2.24 | length 70.3
  Top Layer w0.3: v1(137.7,69.4) 137.75,69.35 R31.2 138.65,67.5 144.5,67.5 ENTER.1@145.4,68.4 ; DOWN.1@145.4,57.7 146.102,58.402 146.102,65.298 v1(145.5,65.9)
  Bottom Layer w0.2: U2.24 130.2,76.9 v1(137.7,69.4) 137.705,69.405 141.712,69.405 141.717,69.4 142,69.4 v1(145.5,65.9)
NetDOWN_2: DOWN.4 ICSP.4 LEFT.4 RIGHT.4 U2.12 UP.4 | length 125.6
  Top Layer w0.3: ICSP.4 115.78,83.72 124.125,75.375 LEFT.4 ; LEFT.4@131.5,75.775 UP.4 157.002,72.073 157.002,67.85 155.748,66.595 144.595,66.595 DOWN.4@142.4,64.4
  Bottom Layer w0.3: ICSP.4 86.98,83.72 88.3,82.4 U2.12
NetICSP_1: ICSP.1 R10.2 U2.18 | length 24.8
  Top Layer w0.2: ICSP.1 82.3,76.1 83.798,74.602 85.5,74.602 85.9,75.002 85.9,76.1 84.6,77.4 84.6,77.881 84.971,78.252 90.966,78.252 92.119,77.1 v2(93.1,77.1)
  Bottom Layer w0.2: v2(93.1,77.1) U2.18
  Bottom Layer w0.3: ICSP.1@79.05,76.35 R10.2
NetLCD1_4: LCD1.4 R23.2 | length 9.3
  Top Layer w0.3: v1(83.8,68.1) 84.7,69 LCD1.4
  Bottom Layer w0.3: R23.2 v1(83.8,68.1)
NetLCD1_6: LCD1.6 U2.2 | length 5.9
  Top Layer w0.3: v1(85.2,70.6) LCD1.6
  Bottom Layer w0.3: v1(85.2,70.6) U2.2@86.55,70.6
NetLCD1_7: LCD1.7 U2.3 | length 5.9
  Top Layer w0.3: v1(85.2,71.4) LCD1.7
  Bottom Layer w0.3: v1(85.2,71.4) U2.3@86.55,71.4
NetLCD1_8: LCD1.8 U2.4 | length 5.9
  Top Layer w0.3: v1(85.2,72.2) LCD1.8
  Bottom Layer w0.3: v1(85.2,72.2) U2.4@86.55,72.2
NetLCD1_9: LCD1.9 U2.14 | length 9
  Top Layer w0.3: LCD1.9 91.6,73 v1(91.5,73)
  Bottom Layer w0.3: U2.14 89.9,74.6 v1(91.5,73)
NetLCD1_12: LCD1.12 U2.11 | length 6.9
  Top Layer w0.3: v1(85.2,77.7) 87.5,75.4 LCD1.12
  Bottom Layer w0.3: v1(85.2,77.7) U2.11
NetLED1_K: LED1.K R19.2 | length 2
  Top Layer w0.3: LED1.K@75.65,67.95 R19.2
NetLED2_K: LED2.K R12.1 | length 1.8
  Top Layer w0.3: R12.1 LED2.K
NetLED3_K: LED3.K R15.1 | length 1.8
  Top Layer w0.3: LED3.K R15.1
NetLED4_A: LED4.2 Q3.2 | length 12.5
  Top Layer w0.25: v1(88.6,57.5) 89.223,56.877 89.223,47.265 LED4.2
  Bottom Layer w0.25: v1(88.6,57.5) 88.65,57.55 Q3.2
NetLED4_KB: LED4.3 LED5.3 LED6.3 R24.2 | length 70.4
  Top Layer w0.25: LED4.3 v1(90.813,47.3) ; v1(94,61) 95.8,59.2 ; v1(104.4,48.1) 103.513,48.1 LED5.3 103.5,53.269 100.967,55.802 96.067,55.802 95.8,56.069 95.8,59.2 ; LED6.3 117.1,58.1 114.2,61 102.938,61 101.138,59.2 95.8,59.2
  Bottom Layer w0.25: v1(90.813,47.3) 103.8,47.3 104.4,47.9 v1(104.4,48.1) ; v1(94,61) R24.2
NetLED4_KG: LED4.4 LED5.4 LED6.4 R22.2 | length 79.9
  Top Layer w0.25: LED4.4 91.913,48.113 v1(91.9,48.1) 91.9,55.3 86.723,60.477 86.723,62.223 87.5,63 v1(88.9,63) 89.92,61.98 94.406,61.98 96.381,60.005 100.805,60.005 102.605,61.805 114.564,61.805 117.905,58.464 117.905,50.308 LED6.4 ; v1(104.4,49.5) 105.113,49.5 LED5.4
  Bottom Layer w0.25: R22.2 v1(88.9,63) ; v1(91.9,48.1) 93.3,49.5 v1(104.4,49.5)
NetLED4_KR: LED4.1 LED5.1 LED6.1 R21.2 | length 78.7
  Top Layer w0.25: v1(87.3,61.6) 87.323,61.577 93,61.577 ; v1(91.9,46.5) 92.988,46.5 LED4.1 93.9,47.388 93.9,48.8 93,49.7 93,61.577 ; v1(104.2,45) 105.012,45 LED5.1 ; LED6.1 117.502,49.085 117.502,58.298 114.398,61.402 102.771,61.402 100.971,59.602 96.214,59.602 94.239,61.577 93,61.577
  Bottom Layer w0.25: v1(91.9,46.5) 93.4,45 v1(104.2,45)
NetLED5_A: LED5.2 Q4.2 | length 18.6
  Top Layer w0.25: v1(93.8,57.5) 95.9,55.4 100.8,55.4 102.723,53.477 102.723,47.265 LED5.2
  Bottom Layer w0.25: Q4.2@93.1,57.5 v1(93.8,57.5)
NetLED6_A: LED6.2 Q5.2 | length 34.3
  Top Layer w0.3: v1(97.4,57.5) 100.043,57.5 103.115,60.573 114.023,60.573 116.673,57.923 116.673,49.3 116.298,48.925 116.298,47.29 LED6.2
  Bottom Layer w0.3: Q5.2@96.7,57.5 v1(97.4,57.5)
NetPH_1: PH.1 R6.1 | length 3.1
  Bottom Layer w1: R6.1@158,87.5 PH.1
NetPH_2: PH.2 U1.6 U1.7 | length 20.5
  Bottom Layer w0.45: U1.7 U1.6 PH.2@160.975,85.125 ; PH.2@161.1,85 163.6,85 166.2,82.4 PH.2@166.2,92.6
NetQ1_1: Q1.3 R3.2 | length 1.6
  Top Layer w0.2: R3.2@160.7,79.85 Q1.3
NetQ1_2: Q1.2 R1.1 R2.1 | length 2.9
  Top Layer w0.2: R1.1 R2.1 ; R2.1@161,77.95 Q1.2
NetQ2_1: Q2.3 R17.1 | length 1.6
  Top Layer w0.3: R17.1@74.55,74.1 Q2.3
NetQ2_3: Q2.1 R16.2 | length 1.9
  Top Layer w0.3: Q2.1 76.15,78.575 R16.2
NetQ3_1: Q3.1 R25.1 | length 1.8
  Bottom Layer w0.2: R25.1@91.35,55.8 Q3.1
NetQ4_1: Q4.1 R26.1 | length 1.8
  Bottom Layer w0.2: R26.1@94.95,55.8 Q4.1
NetQ5_1: Q5.1 R27.2 | length 1.7
  Bottom Layer w0.2: R27.2@98.55,55.8 Q5.1
NetR3_1: R3.1 U2.25 | length 66.3
  Top Layer w0.2: v2(157.8,79.9) R3.1
  Bottom Layer w0.2: U2.25@97.3,76.1 96.702,76.698 96.702,78.002 99.4,80.7 150.602,80.7 151.902,79.4 157.3,79.4 v2(157.8,79.9)
NetR11_2: R11.2 U3.7 | length 4.9
  Bottom Layer w0.3: 110.146,46.348 110.401,46.602 112.298,46.602 U3.7
  Bottom Layer w0.4: R11.2 108.798,46.348 110.146,46.348
NetR13_2: R13.2 U2.36 U3.5 U3.15 | length 41
  Top Layer w0.2: v1(106.5,50.5) v1(106.5,51.8)
  Bottom Layer w0.2: U2.36 94.7,66 95.748,64.952 97.446,64.952 102.548,59.851 102.548,54.854 105.602,51.8 U3.15 ; v1(106.5,50.5) 106.5,45.543 107.295,44.748 108.798,44.748 R13.2
  Bottom Layer w0.4: R13.2@109.65,45.3 U3.5
NetR21_1: R21.1 U2.44 | length 4.4
  Bottom Layer w0.5: R21.1 88.3,65.05 U2.44
NetR22_1: R22.1 U2.43 | length 3.8
  Bottom Layer w0.5: R22.1@89.1,64.25 U2.43
NetR24_1: R24.1 U2.37 | length 4
  Bottom Layer w0.5: U2.37 93.955,67.995 R24.1@93.955,64.095
NetR25_2: R25.2 U2.41 | length 12.5
  Bottom Layer w0.2: R25.2@90.002,55.952 90.002,58.405 89.848,58.559 89.848,65.705 90.7,66.557 U2.41
NetR26_2: R26.2 U2.38 | length 13.2
  Bottom Layer w0.2: U2.38 93.1,66.557 93.452,66.205 93.452,64.952 92.498,63.998 92.498,56.552 R26.2
NetR27_1: R27.1 U2.27 | length 20.8
  Top Layer w0.2: v1(96.1,64.4) 96.1,74.1 v1(96.5,74.5)
  Bottom Layer w0.2: v1(96.1,64.4) 96.098,64.398 96.098,56.552 R27.1 ; v1(96.5,74.5) U2.27
NetU2_15: U2.15
NetU2_20: U2.20
NetU2_32: U2.32 U3.2 | length 37.9
  Top Layer w0.2: v1@99.052,61.652 99.052,68.771 99.8,69.519 v1(99.8,70.5)
  Bottom Layer w0.2: U2.32 v1(99.8,70.5) ; v1(99,61.6) 101.49,59.11 101.49,54.416 105.048,50.858 105.048,45.255 106.953,43.35 U3.2
NetU2_33: U2.33 U3.4 U3.14 | length 43.2
  Top Layer w0.2: v1(97.9,63.6) 97.9,68.4 v1(99.2,69.7)
  Bottom Layer w0.2: v1(97.9,63.6) 98.3,63.6 102.195,59.705 102.195,54.708 105.753,51.15 ; U2.33 v1(99.2,69.7) ; U3.4 109.198,44.65 108.944,44.395 106.905,44.395 105.753,45.547 105.753,51.15 ; U3.14 108.95,51.15 108.798,51.302 106.952,51.302 106.8,51.15 105.753,51.15
NetU2_34: U2.34 U3.3 | length 34.9
  Top Layer w0.2: v1(98.5,62.5) v1(98.5,66)
  Bottom Layer w0.2: U2.34 96.3,66.8 97.1,66 v1(98.5,66) ; v1(98.5,62.5) 98.881,62.5 101.843,59.538 101.843,54.562 105.401,51.004 105.401,45.401 106.759,44.043 107.157,44.043 107.2,44 U3.3
NetU2_35: U2.35 U3.6 U3.16 | length 35.5
  Top Layer w0.2: v1(110.25,52.45) 110.8,51.9 v1(110.8,46)
  Top Layer w0.4: v1@110.7,46 v1(110.8,46)
  Bottom Layer w0.2: U2.35 95.5,66.3 96.495,65.305 97.592,65.305 102.9,59.997 102.9,55 105.45,52.45 v1(110.25,52.45) U3.16
  Bottom Layer w0.4: v1(110.8,46) 110.85,45.95 U3.6
USB_D_N: U2.9 USB1.2 | length 29.1
  Top Layer w0.2: USB1.2 62.642,83.4 64.142,81.9 76.242,81.9 78.042,80.1 79.642,80.1 83.642,76.1 v1(85,76.1)
  Bottom Layer w0.2: v1(85,76.1) U2.9
USB_D_P: U2.8 USB1.3 | length 29.2
  Top Layer w0.2: USB1.3 62.8,82.6 63.954,81.446 76.054,81.446 77.854,79.646 79.454,79.646 83.854,75.246 v1(85,75.246)
  Bottom Layer w0.2: v1(85,75.246) 85.054,75.3 U2.8
V3.3: C2.1@76.6,92.7 C47.1 CON1.1 CON1.2 CON1.12 CON1.13 FB2.1 | length 66.4
  Top Layer w0.9: C47.1 FB2.1
  Top Layer w1: C2.1@76.6,92.7 81.1,92.7 C47.1
  Top Layer w1.3: CON1.13@71.475,92.7 C2.1@76.6,92.7
  Top Layer w2: CON1.2 CON1.1 CON1.13
  Bottom Layer w1: CON1.12 62.2,49.325 62.2,85.1 65.125,88.025 CON1.2
V5: CON1.4 CON1.6 CON1.21 CON1.22 CON1.23 | length 40.8
  Top Layer w1: CON1.6 63.448,69.173 63.448,57.775 64.65,56.573 70.927,56.573
  Top Layer w2: CON1.23 CON1.22 CON1.21
  Bottom Layer w1: CON1.6 63.448,73.277 63.448,77.573 CON1.4
V5SB: CON1.9 R17.2 R18.2 | length 22.3
  Top Layer w0.3: CON1.9 67.375,60.5 72.3,60.5 74.5,62.7 R17.2 R18.2
V12: C1.1 C20.1 C21.1 C22.1 C23.1 C24.1 C25.2 C26.2 C27.2 C28.2 C29.2 C30.2 C31.2 C32.2 C33.2 CON1.10 CON1.11 CON2.3 CON2.4 U3.1 U3.17 U3.18 U3.19 U3.21 U3.26 U3.29 U3.34 U3.36 | length 150.1
  Top Layer w0.4: v1(110.8,42.7) C28.2 ; v1(110.8,53.1) C25.2@111.9,52 ; v1(110.8,53.8) C29.2 ; C30.2 v1(126.8,52.4) ; C32.2@125.4,47.2 v1(126.8,47.2) ; C31.2@125.4,49.3 v1(126.8,49.3) v1@126.8,49.2 ; C26.2@125.4,53.8 v1(126.8,53.8) ; C27.2@125.5,42.6 v1(126.8,42.6) ; C33.2@125.5,44.1 v1(126.8,44.1) v1@126.8,44
  Top Layer w1: C24.1 111.1,56.3 111.9,55.5 C29.2 C25.2 ; 111.9,40.3 C25.2@111.9,52 ; 125.3,40.2 C27.2 C33.2 C32.2 C31.2 C30.2 C26.2 125.3,55.1 126,55.8 C21.1
  Top Layer w2: CON1.10 CON1.11 65.5,49.635 68.052,47.082 68.052,41.973 CON2.3 ; CON2.4 CON2.3 ; C22.1@127.4,40.2 125.3,40.2 85.9,40.2 84.7,41.4 84.7,42.9 83.45,44.15 C1.1 76.625,44.15 CON2.3
  Bottom Layer w0.4: v1(110.8,42.7) U3.1 ; v1(110.8,53.1) U3.17 ; v1(110.8,53.8) 110.85,53.75 U3.18 ; U3.36 126.7,42.7 v1(126.8,42.6) ; U3.34 126.7,44 v1(126.8,44.1) ; U3.29 126.75,47.25 v1(126.8,47.2) ; U3.26 126.7,49.2 v1(126.8,49.3) ; U3.21 126.75,52.45 v1(126.8,52.4) ; U3.19 126.75,53.75 v1(126.8,53.8)
  Bottom Layer w1.3: C20.1 C24.1
V-12: CON1.14
VBUS: C51.2 U2.42 USB1.1 | length 47.3
  Top Layer w0.3: C51.2 v2@63.8,85.3 ; v2(73.6,82.5) 87.5,82.5 v2(92.1,77.9)
  Top Layer w0.5: USB1.1 61.9,84.2 C51.2
  Bottom Layer w0.3: v2(63.9,85.3) 63.9,85.4 64.4,85.9 71.9,85.9 73.6,84.2 v2(73.6,82.5) ; U2.42 89.9,70.4 92.102,72.602 92.102,76.598 ; 92.1,76.6 v2(92.1,77.9)
VDD: C3.2 C14.2 C16.2 C17.2 C48.1 C49.2 C50.2 FB1.1 FB2.2 ICSP.2 LCD1.10 LCD1.11 LED1.A Q3.3 Q4.3 Q5.3 R1.2 R5.2 R10.1 R23.1 U2.10 U2.28 U2.40 | length 191.8
  Top Layer w0.5: LED1.A 78.472,67.028 v1(79,66.5) ; v1(79.8,74.1) v1(80.6,74.1) 82.7,74.1 ; 90.9,74.1 82.7,74.1 ; v2(101.3,78.4) v2(101.3,74.6) 100.502,73.802 100.502,61.502 99.7,60.7 v2(97.6,60.7) 95.6,62.7 v2(91.4,62.7) 89.9,64.2 85.8,64.2 82.702,67.298 82.702,74.098 82.7,74.1 ; v2(157.8,77.9) 157.8,77.85 R1.2 R5.2
  Top Layer w0.9: FB2.2 C48.1 C3.2 FB1.1
  Bottom Layer w0.5: ICSP.2 79.39,78.05 R10.1 83.15,78.05 C14.2 84.3,76.9 U2.10 ; v1(79,66.5) R23.1@79,68.05 ; C50.2 v1(79.8,74.1) v1(80.6,74.1) ; Q3.3 90.4,60.1 91.302,61.002 91.302,65.398 C17.2 91.5,66 U2.40 ; Q5.3 v2(97.6,60.7) ; U2.28 99.4,73.7 C16.2 v2(101.3,74.6) ; v2(101.3,78.4) 132.1,78.4 135.302,75.198 140.591,75.198 143.293,77.9 v2(157.8,77.9)
  Bottom Layer w0.9: R23.1 C49.2@79.05,70.5
  Bottom Layer w1: C49.2 79.15,72.45 ; C50.2 79.15,72.45 ; v2(88.5,92.3) 81.1,92.3 76.2,87.4 76.2,81.24 ICSP.2 77.398,77.238 77.398,74.202 79.15,72.45
  other v1: 87.5,92.3
VSS: C3.1 C11.2 C14.1 C16.1 C17.1 C18.1 C19.1 C48.2 C49.1 C50.1 C51.1 CON3.2 CON4.2 ICSP.3 LCD1.2 LCD1.3 LCD1.5 LCD1.13 Q1.1 R4.1 R19.1 R20.2 R28.1 R29.1 R30.1 R31.1 U2.6 U2.29 U2.39 USB1.4 USB1.5 USB1.6 USB1.7 USB1.8 USB1.9 | length 256.6
  Top Layer w0.5: USB1.8 USB1.9 USB1.7 USB1.6 61.1,77.5 72.3,77.5 73,76.8 76.769,76.8 77.402,76.167 R19.1@77.402,69.952 ; USB1.6@60.55,78.25 USB1.5 USB1.4 ; USB1.8@60.6,86.9 C51.1 ; R19.1 80.9,69.9 v1(82,68.8) ; v2(84,69.8) LCD1.5 92.3,69.8 ; LCD1.2 92,67.4 92.3,67.7 ; LCD1.3 92.3,68.2 ; R28.1@139.45,75.05 v2(140.3,75.9) ; v2(163.6,79.5) 164.2,78.9 Q1.1 168.651,78.9 CON4.2 172.3,75.251 172.3,68.789 CON3.2
  Top Layer w0.6: LCD1.13 91.8,76.2 92.3,75.7 ; 92.3,67.7 v1(92.3,69.4) 92.3,69.8 92.3,75.7 ; 139.45,73.9 v2(107.4,73.9) 99.2,82.1 95.8,82.1 94.9,81.2 94.9,77.2 93.4,75.7 92.3,75.7
  Top Layer w0.9: R20.2 C48.2 v2(88.5,90.7) C3.1 R4.1 ; R31.1 R30.1 R29.1 139.45,73.9 R28.1
  Bottom Layer w0.5: ICSP.3 81.62,81.18 C14.1 ; C50.1 82.05,72.45 C49.1 ; C50.1@81.55,73.25 C11.2 83.85,73.7 U2.6 ; v1(82,68.8) C49.1@82,70.55 ; C49.1@82.2,69.8 v2(84,69.8) ; v1(92.3,69.4) U2.39 92.3,66 C17.1 ; U2.29 C18.1 103.102,73.802 107.398,73.802 109.4,71.8 107.298,69.698 103.102,69.698 C19.1 ; v2(140.3,75.9) 143.1,78.7 162.8,78.7 v2(163.6,79.5)
  Bottom Layer w1: ICSP.3 77.398,82.582 77.398,86.841 81.257,90.7 v2(88.5,90.7)
  other v1: 87.5,90.7
pads on no net: A2.2 A2.3 A.2 A.3 B2.2 B2.3 B.2 B.3 C2.2@115.225,52.7 C2.3 C.2 C.3 CON1.0 CON1.20 CON2.5 DOWN.2 DOWN.3 ECC.1 ECC.2 ENTER.2 ENTER.3 LCD1.1 LCD1.14 LEFT.2 LEFT.3 RIGHT.2 RIGHT.3 U2.5 UP.2 UP.3 USB1.MH1 USB1.MH2 X1.3

## Polygon pours and split planes (outlines as drawn)
NetC41_2 on Bottom Layer "Top Layer-No Net" (solid, remove dead copper, pour order 5): 126.5,50.7 126.5,50.3 126.2,50 126.2,49.7 129.2,49.7 129.3,49.6 130.3,49.6 131.1,48.8 148.6,48.8 148.9,49.1 148.9,52.5 148.6,52.8 139,52.8 136.5,50.7
NetC35_2 on Bottom Layer "Top Layer-No Net" (solid, remove dead copper, pour order 19): 154.1,40.6 154.4,40.9 169.7,40.9 170,40.6 170,36.8 169.7,36.5 154.4,36.5 154.1,36.8
NetC43_2 on Bottom Layer "Top Layer-No Net" (solid, remove dead copper, pour order 15): 158.6,54.6 158.4,54.6 158.2,54.4 158.1,54.3 157.6,54.3 154.4,54.3 154.1,54 154.1,50.8 154.4,50.5 165.4,50.5 169.4,50.5 169.5,50.5 169.8,50.8 169.8,54.1 169.8,54.3 169.5,54.6
NetC44_1 on Bottom Layer "Top Layer-No Net" (solid, remove dead copper, pour order 13): 142.1,54.5 141.2,54.5 140.9,54.8 140.9,59.2 141.2,59.5 168.6,59.5 169.4,59.5 169.7,59.2 169.8,59.1 169.8,55.1 169.5,54.8 158.3,54.8 158,54.5
NetC36_1 on Bottom Layer "Top Layer-No Net" (solid, remove dead copper, pour order 11): 141.3,41.1 141,41.4 141,44.4 141.3,44.7 169.5,44.7 169.8,44.4 170,44.2 170,41.4 169.7,41.1
NetC38_2 on Bottom Layer "Top Layer-No Net" (solid, remove dead copper, pour order 9): 126,44.5 127.1,44.5 127.7,43.9 130.3,43.9 130.6,43.6 130.6,40.5 133.8,37.3 148.7,37.3 149,37.6 149,40 148.7,40.3 134.2,40.3 133,41.5 133,43.5 131,45.5 126.3,45.5 126.3,45.1 126,44.8
NetC39_2 on Bottom Layer "Top Layer-No Net" (solid, remove dead copper, pour order 7): 126.3,46.8 127.5,46.8 127.7,47 135.9,47 136.2,46.7 136.2,41.6 135.9,41.3 133.5,41.3 133.2,41.6 133.2,43.6 131,45.8 126.3,45.8 126.3,46.1 125.9,46.5
NetC42_2 on Bottom Layer "Top Layer-No Net" (solid, remove dead copper, pour order 3): 127.1,52 127.7,52.6 131.5,52.6 133.3,54.4 133.3,56.5 133.7,56.8 135.9,56.8 136.3,56.5 136.3,51.3 136,51 126.4,51 126.4,51.3 126.1,51.6 126.1,52
GND on Bottom Layer "Top Layer-No Net" (solid, remove dead copper, pour order 2): 113.3,54 124.3,54 124.3,42.5 113.3,42.5

## Other copper
Bottom Layer:
  rectangle net NetPH_2: 156.7,84.5 158.3,85
  rectangle net NetC13_1: 152.5,83.8 154.1,84.5

## Silkscreen, mask and mechanical layers (free items; w line width, h text height)
Top Overlay:
  drawing of 66 lines, arcs and shapes, not listed
Bottom Overlay:
  drawing of 50 lines, arcs and shapes, not listed

## Text inside footprints (layer, text, board x,y; h text height)
C1: Bottom Overlay "+" at 77.1,48.6 h1.5 r90
C2: Bottom Overlay "+" at 74.7,94.2 h1.5 r90
C20: Bottom Overlay "+" at 101.9,54.7 h1.5 r270
C21: Bottom Overlay "+" at 130.5,54.7 h1.5 r270
C22: Bottom Overlay "+" at 130.2,41.7 h1.5 r90
C23: Bottom Overlay "+" at 108.2,41.6 h1.5 r90
C24: Bottom Overlay "+" at 107.3,54.8 h1.5 r270
USB1: Mechanical 1 "PCB Edge" at 52.268,86.636 h0.25 r270